# EAGLE board LCD01 (EAGLE 5.10)
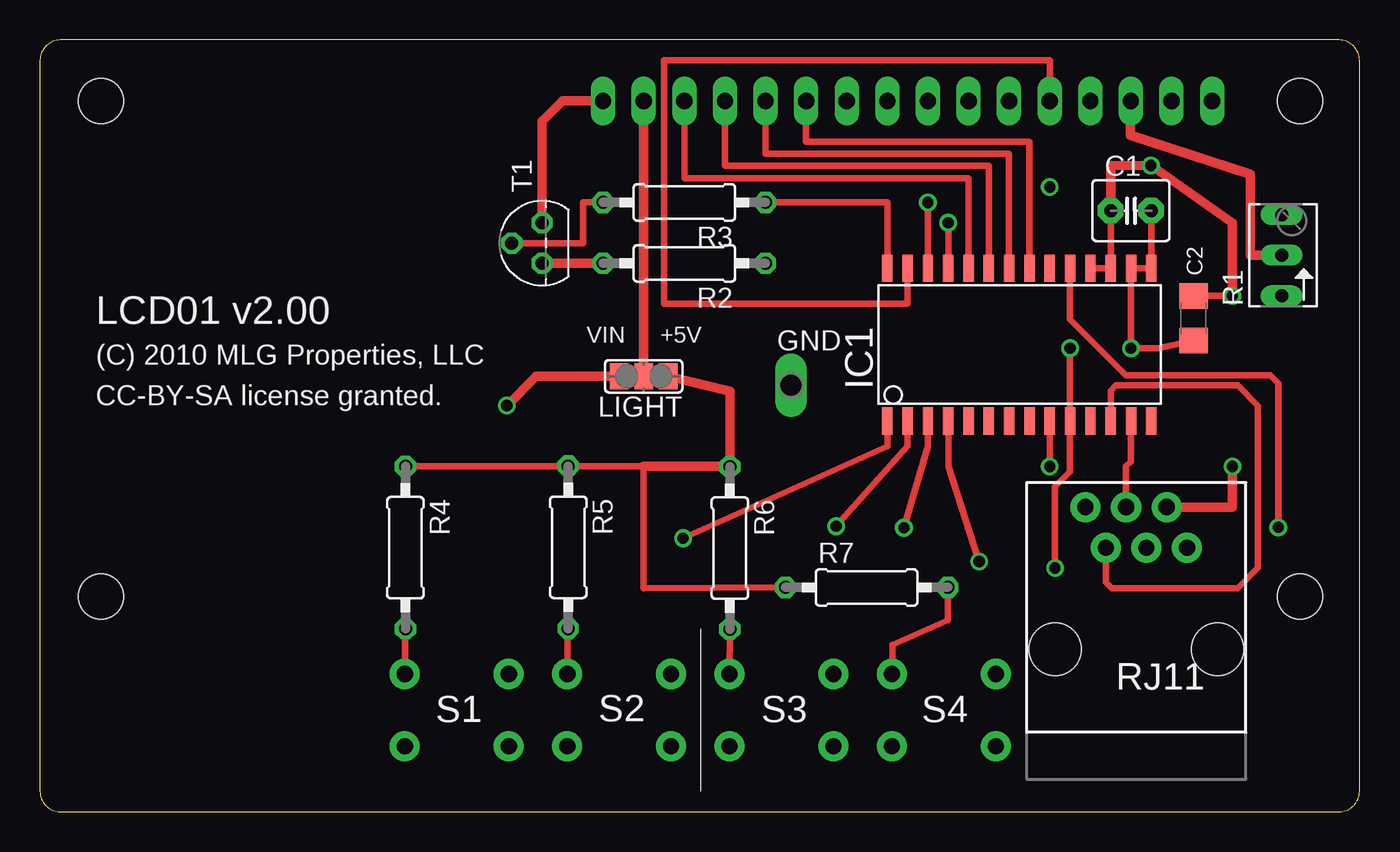
[diagram p0: board, top side]
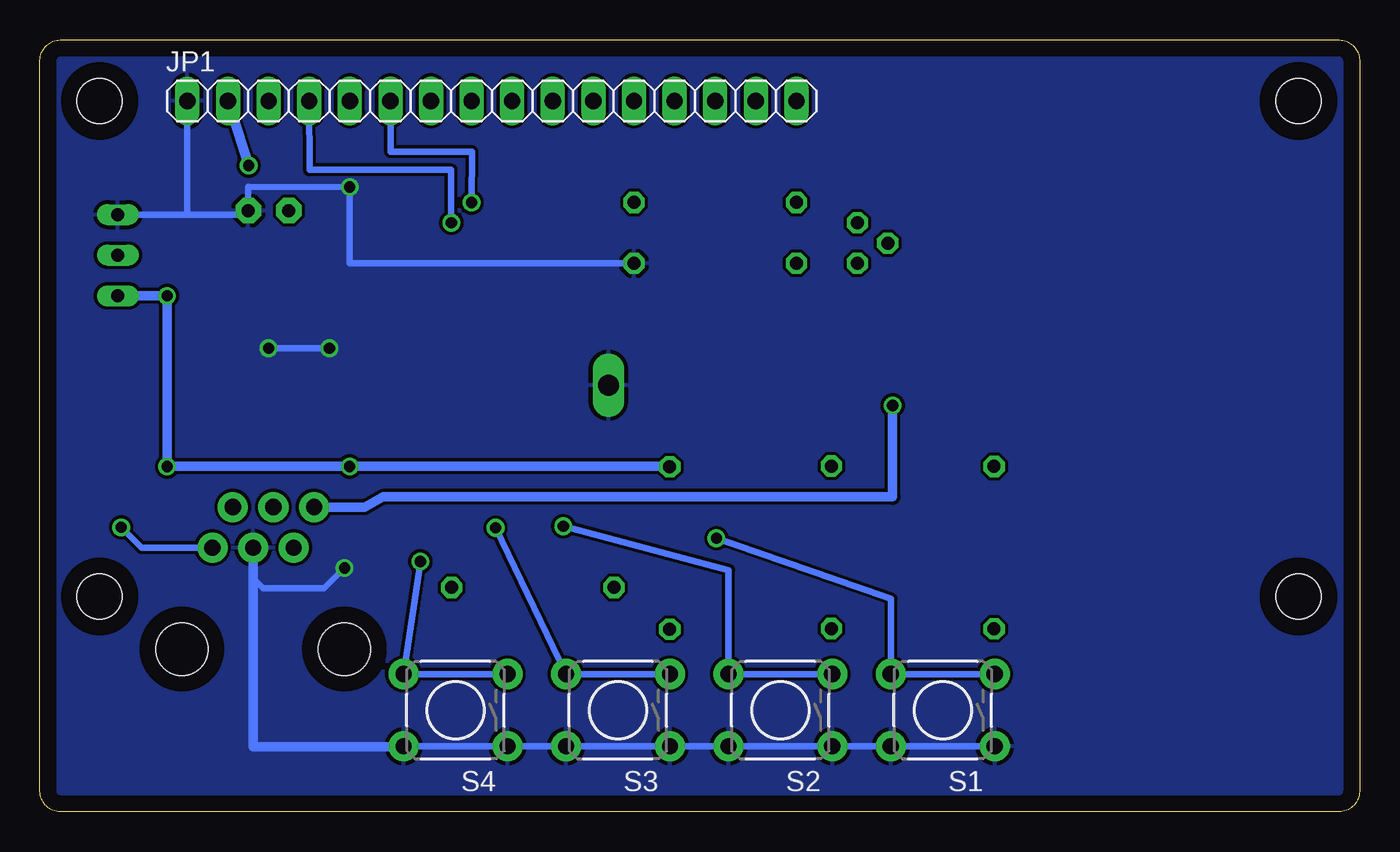
[diagram p1: board, bottom side, seen from below]

Size 82.55 x 48.26 mm. Coordinates in mm from the lower left corner, seen from the top.
Outline: 0,1.27 arc90 1.27,0 81.28,0 arc90 82.55,1.27 82.55,46.99 arc90 81.28,48.26 1.27,48.26 arc90 0,46.99 0,1.27
Copper layers (1*16): Top 0.035mm / dielectric 1.5mm / Bottom 0.035mm
Design rules "default": minimum track width 10mil, minimum drill 24mil, track to track 8mil, track to pad 8mil, pad to pad 8mil, via to via 8mil, smd to smd 8mil, copper to edge 40mil, drill to drill 8mil, minimum pad ring 10mil, minimum via ring 8mil, stop-mask expansion 4mil, vias tented up to drill 0mil, thermal gap 10mil
Holes 2.8 mm at 3.81,44.45 3.81,13.46 78.82,13.46 78.82,44.45

## Footprints (pad centres in the part's own frame; a part is rotated, then mirrored left to right if it is on the bottom)
C2.5-4 = drill 0.813 pad 1.6 octagon: 1 -1.27,0; 2 1.27,0
1206 = smd 1.6 x 1.8: 1 -1.4,0; 2 1.4,0
P1-13Y = drill 1.321 pad 1.905 long: TP 0,0
SO28W = smd 0.65 x 1.7: 1 -7.62,-4.78; 2 -6.35,-4.78; 3 -5.08,-4.78; 4 -3.81,-4.78; 5 -2.54,-4.78; 6 -1.27,-4.78; 7 0,-4.78; 8 1.27,-4.78; 9 2.54,-4.78; 10 3.81,-4.78; 11 5.08,-4.78; 12 6.35,-4.78; 13 7.62,-4.78; 14 8.89,-4.78; 15 8.89,4.78; 16 7.62,4.78; 17 6.35,4.78; 18 5.08,4.78; 19 3.81,4.78; 20 2.54,4.78; 21 1.27,4.78; 22 0,4.78; 23 -1.27,4.78; 24 -2.54,4.78; 25 -3.81,4.78; 26 -5.08,4.78; 27 -6.35,4.78; 28 -7.62,4.78
RJ11-6 = drill 1.016 pad 1.88 round: 1 1.905,8.89; 2 3.175,6.35; 3 4.445,8.89; 4 5.715,6.35; 5 6.985,8.89; 6 8.255,6.35 | hole 3.251: 0,0; 10.16,0
1X16 = drill 1.016 long: 1 -19.05,0; 2 -16.51,0; 3 -13.97,0; 4 -11.43,0; 5 -8.89,0; 6 -6.35,0; 7 -3.81,0; 8 -1.27,0; 9 1.27,0; 10 3.81,0; 11 6.35,0; 12 8.89,0; 13 11.43,0; 14 13.97,0; 15 16.51,0; 16 19.05,0
SJ_2 = smd 1.168 x 1.6: 1 -1.524,0; 2 0,0; 3 1.524,0
B64Y = drill 0.813 long: A 2.54,0; E -2.54,0; S 0,0
0207/10 = drill 0.813 octagon: 1 -5.08,0; 2 5.08,0
TACTILE-PTH = drill 1.016 pad 1.88 round: 1 -3.251,2.261; 2 3.251,2.261; 3 -3.251,-2.261; 4 3.251,-2.261
TO92 = drill 0.813 octagon: 1 1.27,0; 2 0,1.905; 3 -1.27,0

## Placement (x,y rotation side)
C1  0.1u  [C2.5-4]  68.25,37.59 0 top
C2  10u  [1206]  72.16,30.86 270 top
GND  GND  [P1-13Y]  46.99,26.67 0 top
IC1  MCP23017SO  [SO28W]  60.63,29.21 0 top
J2  RJ11-6PTH  [RJ11-6]  63.5,10.16 0 top
JP1  [1X16]  54.28,44.45 0 bottom
LIGHT  [SJ_2]  37.77,27.23 180 top
R1  10K  [B64Y]  77.67,34.8 90 top
R2  150  [0207/10]  40.31,34.29 180 top
R3  1K  [0207/10]  40.31,38.1 180 top
R4  4.7K  [0207/10]  22.86,16.51 270 top
R5  4.7K  [0207/10]  33.05,16.54 270 top
R6  4.7K  [0207/10]  43.15,16.48 270 top
R7  4.7K  [0207/10]  51.71,14.02 0 top
S1  [TACTILE-PTH]  26.07,6.35 180 bottom
S2  [TACTILE-PTH]  36.23,6.35 180 bottom
S3  [TACTILE-PTH]  46.39,6.35 180 bottom
S4  [TACTILE-PTH]  56.55,6.35 180 bottom
T1  2N3904  [TO92]  31.42,35.56 90 top

## Library data of the parts
C1 = capacitor-wima
C2 J2 LIGHT S1-S4 = SparkFun
GND = testpad
IC1 = microchip
JP1 = pinhead
R1 = pot
R2-R7 = rcl
T1 = transistor

## Nets
+5V: C1.1 C2.1 IC1.9 IC1.17 IC1.18 J2.5 JP1.2 LIGHT.1 R1.E R4.1 R5.1 R6.1 R7.1
BKLT: IC1.28 R3.1
DB4: IC1.21 JP1.11
DB5: IC1.22 JP1.12
DB6: IC1.23 JP1.13
DB7: IC1.24 JP1.14
EN: IC1.26 JP1.6
GND: C1.2 C2.2 GND.TP IC1.10 IC1.15 IC1.16 J2.4 JP1.1 R1.A R2.1 S1.1 S1.2 S2.1 S2.2 S3.1 S3.2 S4.1 S4.2
INT: IC1.19 J2.6
N$1: JP1.3 R1.S
N$2: R3.2 T1.2
N$3: R2.2 T1.3
N$4: JP1.16 T1.1
N$5: IC1.1 R4.2 S1.3 S1.4
N$7: IC1.3 R6.2 S3.3 S3.4
N$8: JP1.15 LIGHT.2
N$9: IC1.4 R7.2 S4.3 S4.4
N$10: IC1.2 R5.2 S2.3 S2.4
RS: IC1.25 JP1.4
RW: IC1.27 JP1.5
SCL: IC1.12 J2.2
SDA: IC1.13 J2.3
VIN: J2.1 LIGHT.3

## Tracks (layer width: path | path; a pad name or v marks a point on that pad's centre or on a via)
+5V  (via drill 0.7 pad 0.81)
  Top 0.406: C1.1 IC1.17 IC1.18 | v63.17,21.59 IC1.9 | 42.82,21.59 R6.1 42.85,21.59 | R4.1 R5.1 37.77,21.59 37.77,13.97 R7.1 | v74.6,32.26 C2.1
  Top 0.61: v74.6,32.26 74.6,36.83 v69.49,40.41 66.98,40.39 C1.1 | 37.77,21.59 42.85,21.59 | LIGHT.1 43.18,26.29 R6.1 | J2.5 74.6,19.05 v74.6,21.59
  Bottom 0.406: R6.1 42.88,21.59
  Bottom 0.61: 42.88,21.59 v63.17,21.59 v74.6,21.59 v74.6,32.26 R1.E | v69.49,40.41 JP1.2
BKLT
  Top 0.406: R3.1 53.01,38.1 IC1.28
DB4
  Top 0.406: JP1.11 47.93,41.91 61.9,41.91 IC1.21
DB5
  Top 0.406: JP1.12 45.39,41.15 60.63,41.15 IC1.22
DB6
  Top 0.406: IC1.23 59.36,40.39 42.85,40.39 JP1.13
DB7
  Top 0.406: IC1.24 58.09,39.62 40.31,39.62 JP1.14
EN  (via drill 0.7 pad 0.81)
  Top 0.406: IC1.26 v55.55,38.1
  Bottom 0.406: v55.55,38.1 55.52,41.27 60.63,41.27 JP1.6
GND  (via drill 0.7 pad 0.81)
  Top 0.406: C1.2 IC1.15 IC1.16 v68.25,28.98 69.98,28.98 C2.2 | v64.44,28.98 IC1.10 64.44,21.26 63.5,20.32 v63.5,15.24
  Bottom 0.406: S4.1 S4.2 S3.1 S3.2 S2.1 S2.2 S1.1 S1.2 | 69.52,38.1 69.52,39.09 v63.17,39.06 63.17,34.29 R2.1 | C1.2 69.52,38.1 | v64.44,28.98 v68.25,28.98 | 73.33,37.34 70.28,37.34 69.52,38.1 | 73.33,37.34 JP1.1 | 73.33,37.34 R1.A | J2.4 69.22,14.61 68.58,13.97 64.77,13.97 v63.5,15.24
  Bottom 0.61: J2.4 69.22,4.06 59.8,4.06 S4.2
  pour Bottom: 1.27,47.62 arc90 0.64,46.99 0.64,1.27 arc90 1.27,0.64 81.28,0.64 arc90 81.92,1.27 81.92,46.99 arc90 81.28,47.62
INT  (via drill 0.7 pad 0.81)
  Top 0.406: IC1.19 64.44,30.81 67.94,27.3 76.96,27.3 77.47,26.8 v77.47,17.78
  Bottom 0.406: J2.6 76.2,16.51 v77.47,17.78
N$1
  Top 0.61: R1.S 75.72,34.8 75.72,39.85 68.2,42.32 JP1.3
N$2
  Top 0.406: R3.2 33.96,38.1 33.96,35.56 T1.2
N$3
  Top 0.61: T1.3 R2.2
N$4
  Top 0.61: T1.1 31.42,43.18 32.7,44.46 JP1.16
N$5  (via drill 0.7 pad 0.81)
  Top 0.406: v40.23,17.09 53.01,22.86 IC1.1 | S1.3 R4.2
  Bottom 0.406: S1.3 S1.4 29.31,13.31 v40.23,17.09
N$7  (via drill 0.7 pad 0.81)
  Top 0.406: S3.3 R6.2 | IC1.3 55.55,22.86 v54.05,17.75
  Bottom 0.406: S3.3 S3.4 v54.05,17.75
N$8
  Top 0.61: LIGHT.2 JP1.15
N$9  (via drill 0.7 pad 0.81)
  Top 0.406: v58.75,15.65 56.82,21.59 IC1.4 | S4.3 53.31,10.44 56.79,11.96 R7.2
  Bottom 0.406: S4.3 S4.4 v58.75,15.65
N$10  (via drill 0.7 pad 0.81)
  Top 0.406: S2.3 R5.2 | IC1.2 54.28,22.86 v49.81,17.86
  Bottom 0.406: S2.3 S2.4 39.47,15.11 v49.81,17.86
RS  (via drill 0.7 pad 0.81)
  Top 0.406: IC1.25 v56.82,36.83
  Bottom 0.406: JP1.4 65.68,40.13 56.82,40.13 v56.82,36.83
RW
  Top 0.406: JP1.5 63.17,46.99 39.04,46.99 39.04,31.75 54.28,31.75 IC1.27
SCL
  Top 0.406: IC1.12 66.98,26.34 67.31,26.67 74.93,26.67 76.2,25.4 76.2,15.24 74.93,13.97 67.06,13.97 66.67,14.35 J2.2
SDA
  Top 0.406: IC1.13 68.25,21.89 67.94,21.59 J2.3
VIN  (via drill 0.7 pad 0.81)
  Top 0.61: LIGHT.3 31.04,27.23 v29.21,25.4
  Bottom 0.61: J2.1 62.23,19.05 61.09,19.68 29.21,19.68 v29.21,25.4

## Text on the board
tNames: LCD01 v2.00 | VIN | +5V | (C) 2010 MLG Properties, LLC | CC-BY-SA license granted. | RJ11 | S1 | S2 | S3 | S4